# EAGLE board RascalDS-v1-11-18-10-MWG (EAGLE 5.10)

Size 100 x 80 mm. Coordinates in mm from the lower left corner, seen from the top.
Outline: 0,0 100,0 100,80 0,80 0,0
Copper layers (1*16): Top 0.035mm / dielectric 1.5mm / Bottom 0.035mm
Design rules "default": minimum track width 10mil, minimum drill 24mil, track to track 8mil, track to pad 8mil, pad to pad 8mil, via to via 8mil, smd to smd 8mil, copper to edge 40mil, drill to drill 8mil, minimum pad ring 10mil, minimum via ring 8mil, stop-mask expansion 4mil, vias tented up to drill 0mil, thermal gap 10mil

## Footprints (pad centres in the part's own frame; a part is rotated, then mirrored left to right if it is on the bottom)
0603-CAP = smd 1.1 x 1: 1 -0.85,0; 2 0.85,0
EIA3216 = smd 1.4 x 1.6: A 1.4,0; C -1.4,0
DIODE-1N4148 = drill 0.9 pad 1.88 round: A -3.81,0; C 3.81,0
SOT563 = smd 0.25 x 0.4: 1 0.3,-0.06; 2 0.8,-0.06; 3 1.3,-0.06; 4 1.3,1.26; 5 0.8,1.26; 6 0.3,1.27
1X06 = drill 1.016 pad 1.88 round: 1 0,0; 2 2.54,0; 3 5.08,0; 4 7.62,0; 5 10.16,0; 6 12.7,0
LED-1206 = smd 1.2 x 1.4: A -1.5,0; C 1.5,0
1206 = smd 1.6 x 1.8: 1 -1.4,0; 2 1.4,0
PCH-105D2H,000 = drill 0.8 round: COM 1,7.6; NC 3.6,0; NO 8.7,7.6; P$1 18.9,7.6; P$2 18.9,0
SSOP28DB = smd 0.348 x 1.397: 1 -4.225,-3.656; 2 -3.575,-3.656; 3 -2.925,-3.656; 4 -2.275,-3.656; 5 -1.625,-3.656; 6 -0.975,-3.656; 7 -0.325,-3.656; 8 0.325,-3.656; 9 0.975,-3.656; 10 1.625,-3.656; 11 2.275,-3.656; 12 2.925,-3.656; 13 3.575,-3.656; 14 4.225,-3.656; 15 4.225,3.656; 16 3.575,3.656; 17 2.925,3.656; 18 2.275,3.656; 19 1.625,3.656; 20 0.975,3.656; 21 0.325,3.656; 22 -0.325,3.656; 23 -0.975,3.656; 24 -1.625,3.656; 25 -2.275,3.656; 26 -2.925,3.656; 27 -3.575,3.656; 28 -4.225,3.656
RASCAL_SHIELD_DBG = drill 1.016 pad 1.88 square: 1 -5.08,50.8; 9 -26.924,50.8; 32 -57.404,2.54 | drill 1.016 pad 1.88 round: 2 -7.62,50.8; 3 -10.16,50.8; 4 -12.7,50.8; 5 -15.24,50.8; 6 -17.78,50.8; 7 -20.32,50.8; 8 -22.86,50.8; 10 -29.464,50.8; 11 -32.004,50.8; 12 -34.544,50.8; 13 -37.084,50.8; 14 -39.624,50.8; 15 -42.164,50.8; 16 -44.704,50.8; 17 -5.08,2.54; 18 -7.62,2.54; 19 -10.16,2.54; 20 -12.7,2.54; 21 -15.24,2.54; 22 -17.78,2.54; 23 -22.86,2.54; 24 -25.4,2.54; 25 -27.94,2.54; 26 -30.48,2.54; 27 -33.02,2.54; 28 -35.56,2.54; 29 -49.784,2.54; 30 -52.324,2.54; 31 -54.864,2.54
0603 = smd 1.1 x 1: 1 -0.85,0; 2 0.85,0
SOT-23 = smd 1 x 1.4: 1 -0.95,-1.1; 2 0.95,-1.1; 3 0,1.1
USB-MINIB = smd 2.5 x 0.5: D+ 2.5,0; D- 2.5,0.8; GND 2.5,-1.6; ID 2.5,-0.8; VBUS 2.5,1.6 | smd 2.5 x 2: GND@1 -3,-4.5; GND@2 -3,4.5; GND@3 2.5,4.5; GND@4 2.5,-4.5 | hole 0.9: 0,2.2; 0,-2.2

## Placement (x,y rotation side)
C1  0.1 uF  [0603-CAP]  -19.05,72.39 0 top  (outside the outline)
C2  10 nF  [0603-CAP]  -22.86,72.39 0 top  (outside the outline)
C3  10 uF  [EIA3216]  -52.07,67.31 0 top  (outside the outline)
C4  0.1 uF  [0603-CAP]  -26.67,72.39 0 top  (outside the outline)
D1  1N4148  [DIODE-1N4148]  -34.29,72.39 0 top  (outside the outline)
IC1  TMP102  [SOT563]  -15.24,72.39 0 top  (outside the outline)
JP1  [1X06]  -71.12,55.88 0 top  (outside the outline)
LED1  [LED-1206]  -58.42,67.31 0 top  (outside the outline)
LED2  [LED-1206]  -63.5,67.31 0 top  (outside the outline)
LED3  [LED-1206]  -68.58,67.31 0 top  (outside the outline)
LED4  [LED-1206]  -73.66,67.31 0 top  (outside the outline)
R1  220  [1206]  -15.24,68.58 0 top  (outside the outline)
R2  1k  [1206]  -20.32,68.58 0 top  (outside the outline)
R3  1k  [1206]  -25.4,68.58 0 top  (outside the outline)
R4  220  [1206]  -30.48,68.58 0 top  (outside the outline)
R5  220  [1206]  -35.56,68.58 0 top  (outside the outline)
R6  220  [1206]  -40.64,68.58 0 top  (outside the outline)
R7  1k  [1206]  -45.72,68.58 0 top  (outside the outline)
RY1  PCH-105D2H,000  [PCH-105D2H,000]  -44.45,55.88 0 top  (outside the outline)
U1  FT232RL-BASICSSOP  [SSOP28DB]  -50.8,58.42 0 top  (outside the outline)
U$1  [RASCAL_SHIELD_DBG]  -13.97,1.27 0 top  (outside the outline)
U$2  [0603]  -41.91,72.39 0 top  (outside the outline)
U$3  PMBT2222  [SOT-23]  -76.2,55.88 0 top  (outside the outline)
X1  USBSMD  [USB-MINIB]  -17.78,59.69 0 top  (outside the outline)

## Library data of the parts
C1-C4 D1 IC1 JP1 LED1-LED4 R1-R7 U1 U$2 X1 = SparkFun
RY1 U$1 U$3 = Rascal

## Nets
5V: D1.C RY1.P$1 U$1.26
GND: C1.2 C2.2 C3.C C4.2 IC1.2 LED1.C LED2.C LED3.C LED4.C U1.7 U1.18 U1.21 U1.25 U1.26 U$1.29 U$3.2 X1.GND
N$1: C2.1 U$2.1 X1.VBUS
N$2: U1.15 X1.D+
N$3: U1.16 X1.D-
N$4: C3.A C4.1 U1.20 U$2.2
N$5: R1.1 U1.23
N$6: LED2.A R4.1
N$7: LED1.A R5.1
N$8: LED3.A R1.2
N$9: C1.1 U1.4 U1.17
N$10: R5.2 U$1.14
N$11: IC1.6 R2.1 U$1.18
N$12: R6.1 U1.22
N$13: LED4.A R6.2
N$14: IC1.1 R3.1 U$1.17
N$15: R3.2
N$16: R7.2 U$1.3
N$18: R7.1 U$3.1
N$20: D1.A RY1.P$2 U$3.3
N$21: JP1.1 RY1.NC
N$22: JP1.2 RY1.COM
N$23: JP1.3 RY1.NO
RX: U1.5 U$1.31
TX: U1.1 U$1.32
VCC: IC1.5 R2.2 R4.2 U$1.27 U$1.30

## Tracks (layer width: path | path; a pad name or v marks a point on that pad's centre or on a via)
5V  (2 unrouted)
GND  (16 unrouted)
N$1  (2 unrouted)
N$2  (1 unrouted)
N$3  (1 unrouted)
N$4  (3 unrouted)
N$5  (1 unrouted)
N$6  (1 unrouted)
N$7  (1 unrouted)
N$8  (1 unrouted)
N$9  (2 unrouted)
N$10  (1 unrouted)
N$11  (2 unrouted)
N$12  (1 unrouted)
N$13  (1 unrouted)
N$14  (2 unrouted)
N$16  (1 unrouted)
N$18  (1 unrouted)
N$20  (2 unrouted)
N$21  (1 unrouted)
N$22  (1 unrouted)
N$23  (1 unrouted)
RX  (1 unrouted)
TX  (1 unrouted)
VCC  (4 unrouted)